# Altium PCB LED_bars.PcbDoc
Units mm, origin at the board's own origin, x right, y up, seen from the top; angles counter-clockwise.
Board outline 39.75 x 57.75 mm, 2 copper layers (Top Layer, Bottom Layer); 32 components, 51 nets, 146 pads, 18 vias.
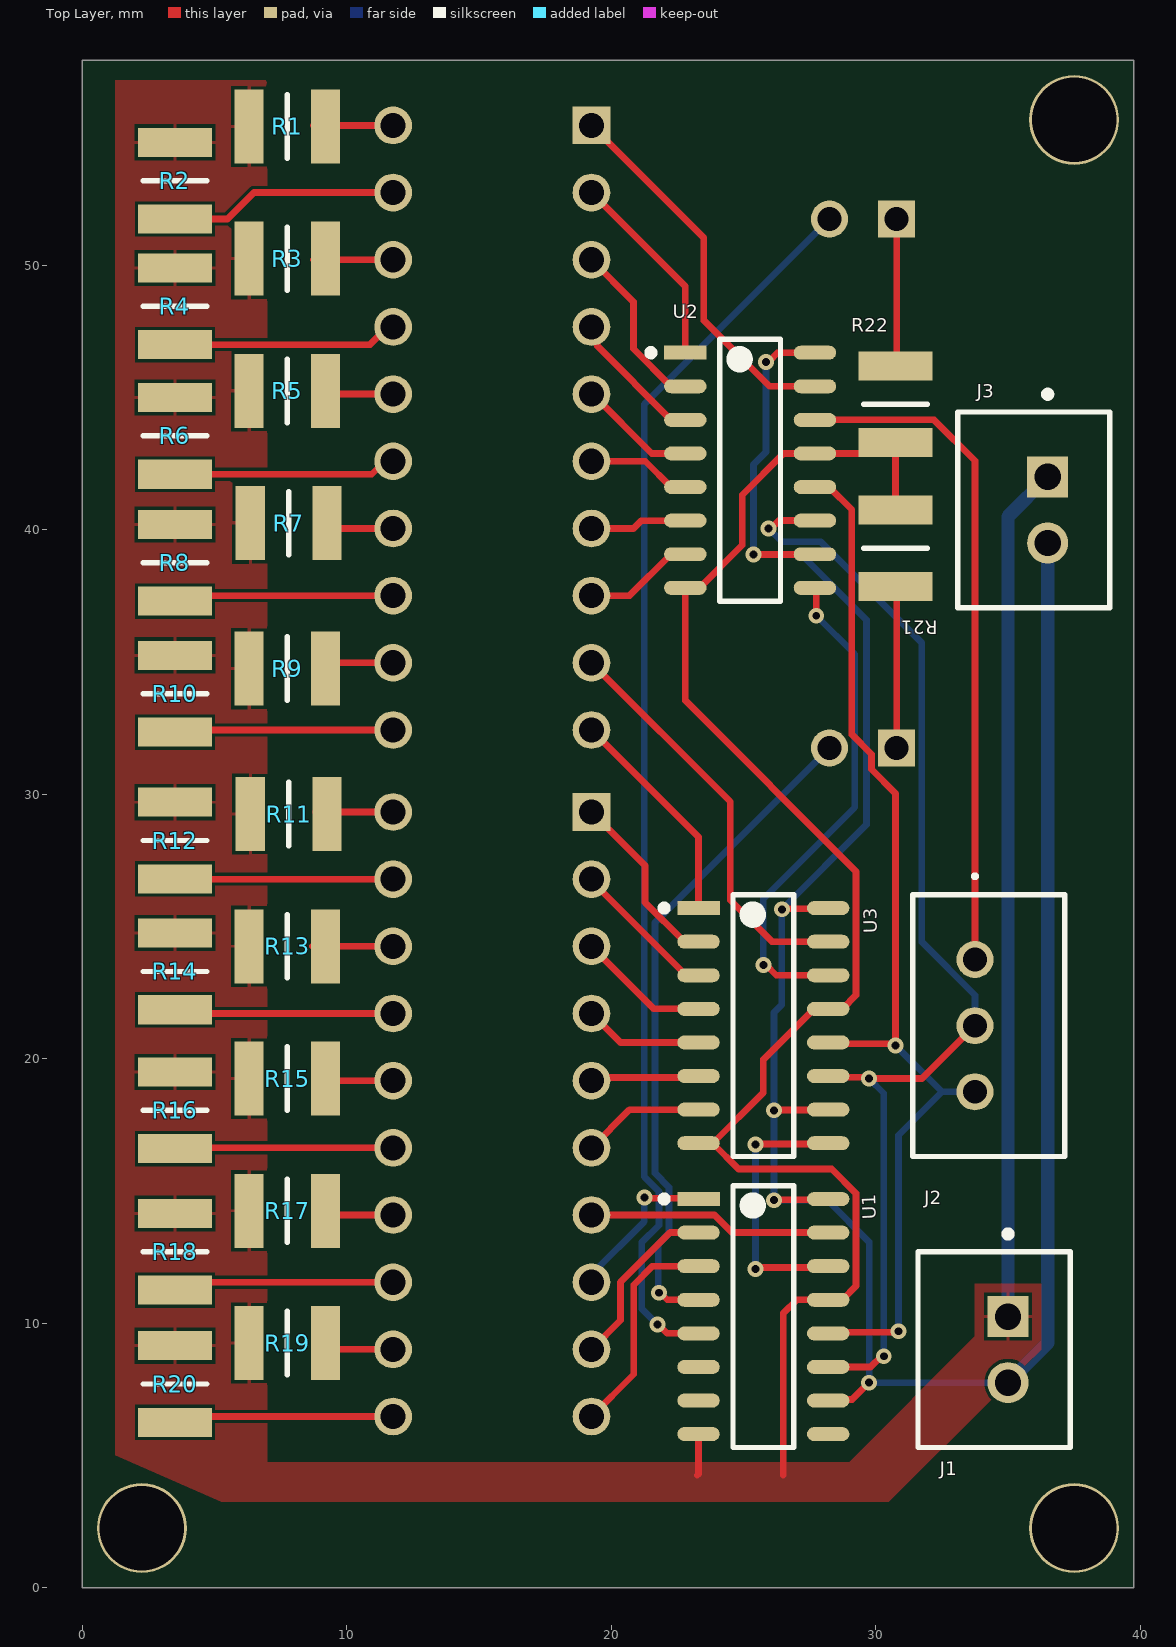
[diagram p0: Top Layer view]
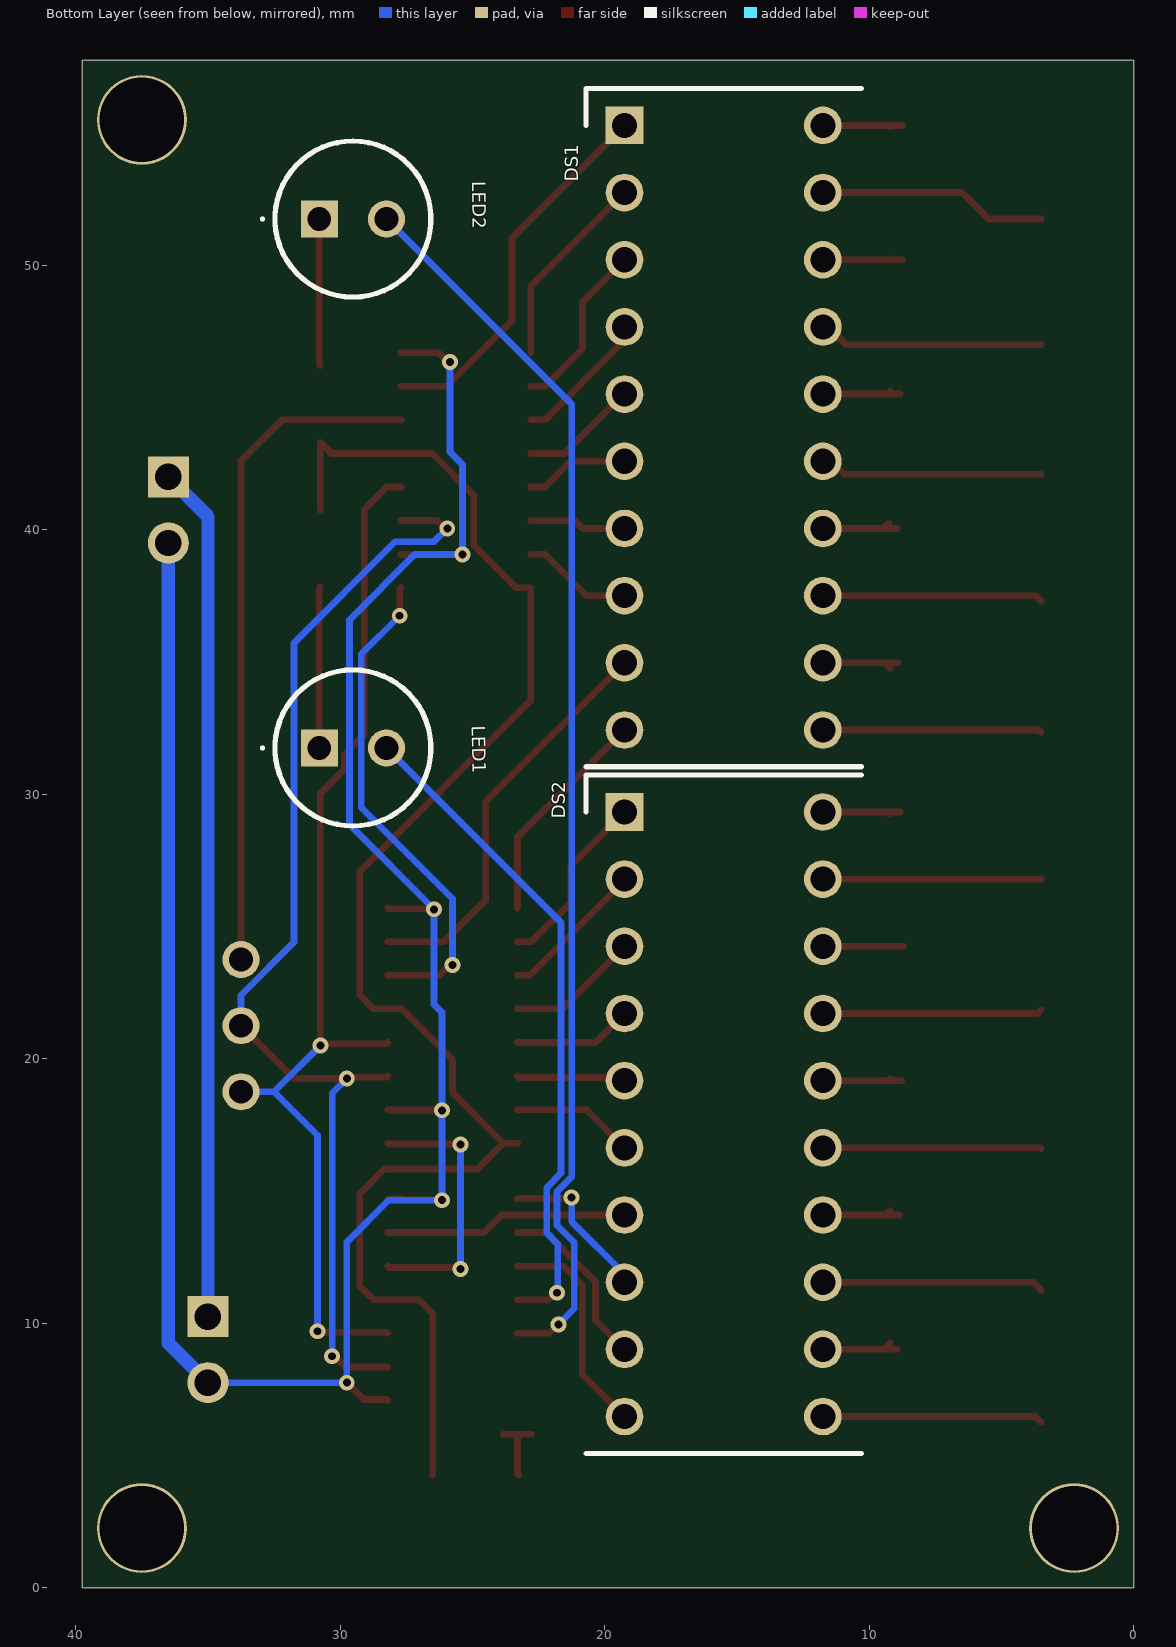
[diagram p1: Bottom Layer view, seen from below]
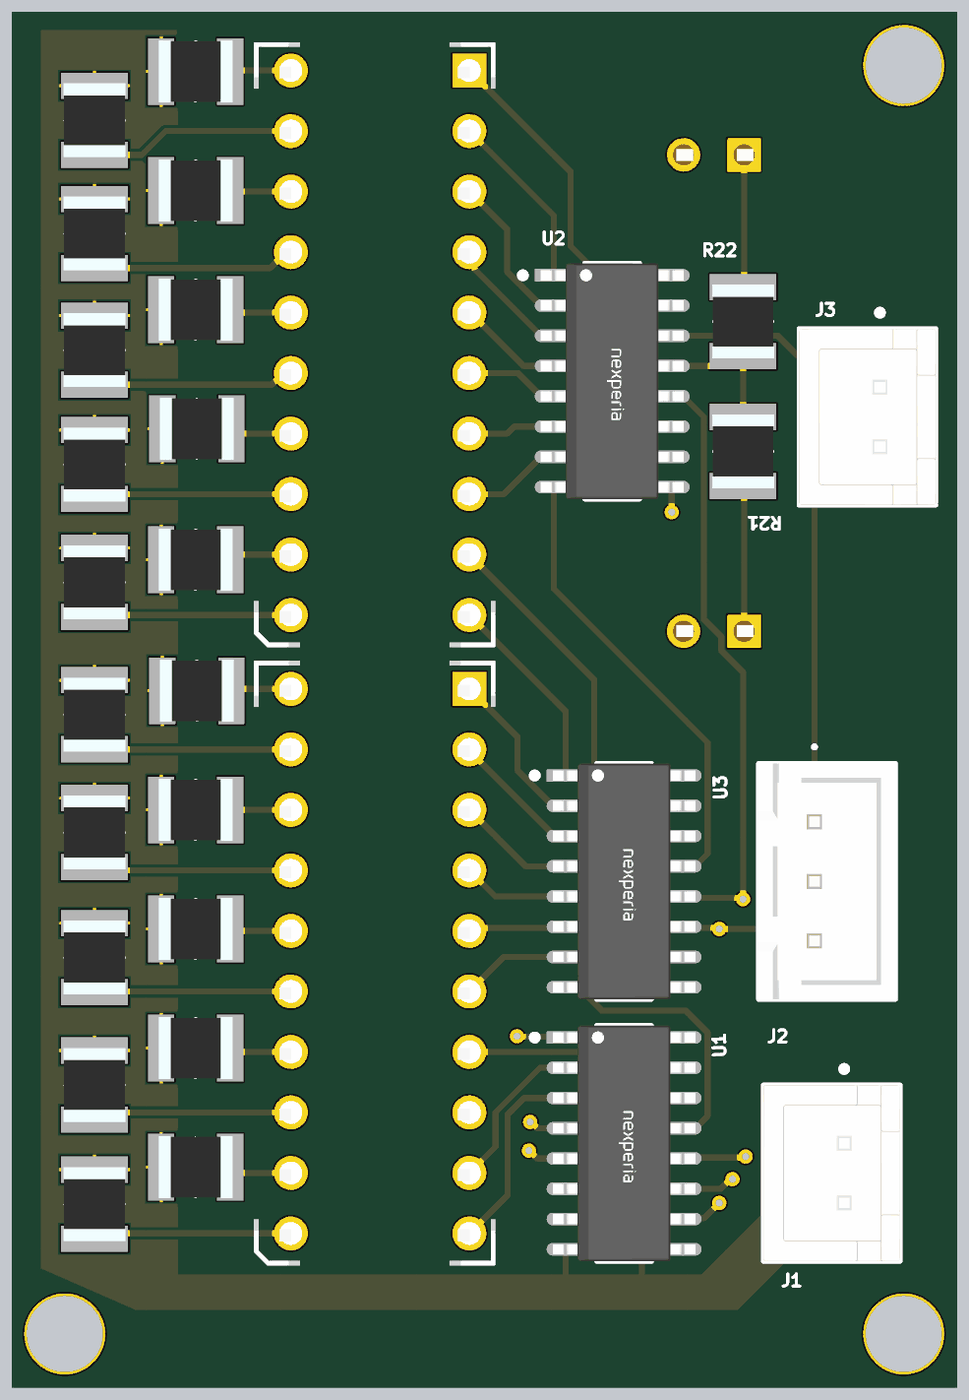
[diagram p2: 3D render of the assembled board from above, using the file's embedded part models]
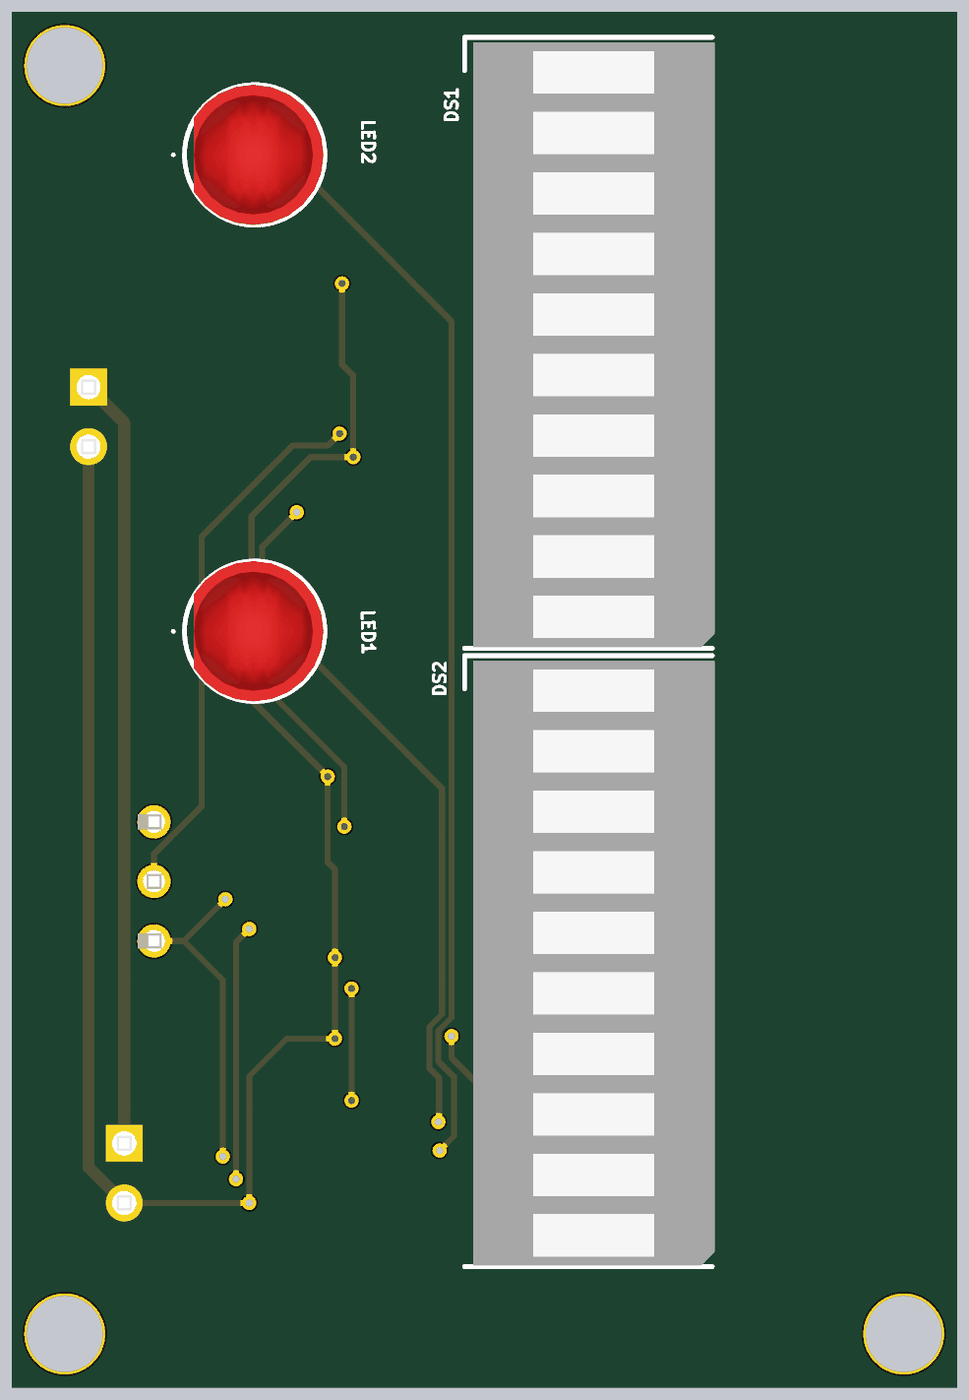
[diagram p3: 3D render of the assembled board from below, using the file's embedded part models]

## Layer stack, top to bottom
Top Solder: solder mask 0.0102, Solder Resist, Dk 3.5
Top Layer: signal copper 0.0356
Dielectric 1: dielectric 0.32, FR-4, Dk 4.8
Bottom Layer: signal copper 0.0356
Bottom Solder: solder mask 0.0102, Solder Resist, Dk 3.5

## Board outline
0,0 0,57.75 39.75,57.75 39.75,0

## Design rules (kind name [scope] priority, off if disabled: settings)
BoardOutlineClearance [All] p1: gap=0.2 ignorepadtopadclearanceinfootprint=FALSE
Clearance [All] p1: gap=0.127 ignorepadtopadclearanceinfootprint=FALSE except(0.25: Arc-Hole Track-Hole SMDPad-Hole THPad-Hole Via-Hole Fill-Hole Poly-Hole Region-Hole Text-Hole)
ComponentClearance [All] p1: gap=0.127 collisioncheckmode=3 verticalgap=0.127 showdistances=TRUE
DiffPairsRouting [All] p1: maxlimit=0.254 minlimit=0.127 mostfreqgap=0.127 toplayer_minwidth=0.127 toplayer_maxwidth=25.4 toplayer_prefwidth=0.127 bottomlayer_minwidth=0.127 bottomlayer_maxwidth=25.4 bottomlayer_prefwidth=0.127 maxuncoupledlength=12.7
Height [All] p1: minheight=0 maxheight=1816.048 prefheight=12.7
HoleSize [All] p1: absolutevalues=TRUE maxlimit=6.3 minlimit=0.3 maxpercent=80.000 minpercent=20.000
HoleToHoleClearance [All] p1: gap=0.25 allowstackedmicrovias=FALSE
MinimumAnnularRing [All] p1: minimumring=0.076
MinimumSolderMaskSliver [All] p1: minsoldermaskwidth=0
PlaneClearance [All] p1: clearance=0.127
PlaneConnect PlaneConnectPowerPads [InPadClass('PowerPads')] p1: planeconnectstyle=Direct reliefexpansion=0.508 reliefentries=4 reliefconductorwidth=0.254 reliefairgap=0.254
PlaneConnect [All] p2: pad.planeconnectstyle=Relief pad.reliefexpansion=0.3 pad.reliefentries=4 pad.reliefconductorwidth=0.127 pad.reliefairgap=0.127 via.planeconnectstyle=Direct via.reliefexpansion=0.3 via.reliefentries=4 via.reliefconductorwidth=0.127 via.reliefairgap=0.127
PolygonConnect PolygonConnectPowerPads [All vs (InPadClass('PowerPads'))] p1: connectstyle=Direct reliefconductorwidth=0.254 reliefentries=4 polygonreliefangle="90 Angle" airgapwidth=0.254
PolygonConnect [All] p2: thpad.connectstyle=Relief thpad.reliefconductorwidth=0.127 thpad.reliefentries=4 thpad.polygonreliefangle="90 Angle" thpad.airgapwidth=0.127 smdpad.connectstyle=Relief smdpad.reliefconductorwidth=0.127 smdpad.reliefentries=4 smdpad.polygonreliefangle="90 Angle" smdpad.airgapwidth=0.127 via.connectstyle=Direct via.reliefconductorwidth=0.127 via.reliefentries=4 via.polygonreliefangle="90 Angle" via.airgapwidth=0.127
RoutingVias [All] p1: holewidth=0.3 width=0.6 viastyle="Through Hole" minholewidth=0.3 minwidth=0.6 maxholewidth=0.6 maxwidth=6.6
SilkToSilkClearance [All] p1: silktosilkclearance=0
SilkToSolderMaskClearance [IsPad] p1: minsilkscreentomaskgap=0.127 clearancetoexposedcopper=TRUE
SolderMaskExpansion [All] p1: expansion=0.075 istentingtop=FALSE
Width [All] p1: maxlimit=25.4 minlimit=0.127 preferedwidth=0.127 minimp=50.000000 maximp=50.000000 favimp=50.000000
20 further rules are at their usual default settings.

## Components (designator, comment, footprint, x,y, rotation, side; value= is the part's Value field where it differs from the comment)
DS1 "DC10GWA" DIPS750W75P254L2540H825Q20N 19.25,55.29 r180 bottom
DS2 "DC10GWA" DIPS750W75P254L2540H825Q20N 19.25,29.33 r180 bottom
J1 "B2B-XH-A(LF)(SN)" FP-B2B-XH-A_LF_SN-MFG 34.475,9 r270 top
J2 "B3B-XH-A_LF__SN_" B3BXHALFSN 33.75,23.75 r270 top
J3 "B2B-XH-A(LF)(SN)" FP-B2B-XH-A_LF_SN-MFG 35.975,40.75 r270 top
LED1 "WP7113ID5V" WP7113ID5V 30.79,31.75 r90 bottom
LED2 "WP7113ID5V" WP7113ID5V 30.79,51.75 r90 bottom
R1 "330" RESC3126X65N 7.75,55.25 r180 top
R2 "RC1210FR-07330RL" RESC3126X65N 3.5,53.2 r90 top
R3 "330" RESC3126X65N 7.75,50.25 r180 top
R4 "RC1210FR-07330RL" RESC3126X65N 3.5,48.45 r90 top
R5 "330" RESC3126X65N 7.75,45.25 r180 top
R6 "RC1210FR-07330RL" RESC3126X65N 3.5,43.55 r90 top
R7 "330" RESC3126X65N 7.8,40.25 r180 top
R8 "RC1210FR-07330RL" RESC3126X65N 3.5,38.75 r90 top
R9 "330" RESC3126X65N 7.75,34.75 r180 top
R10 "330" RESC3126X65N 3.5,33.8 r90 top
R11 "330" RESC3126X65N 7.8,29.25 r180 top
R12 "330" RESC3126X65N 3.5,28.25 r90 top
R13 "330" RESC3126X65N 7.75,24.25 r180 top
R14 "330" RESC3126X65N 3.5,23.3 r90 top
R15 "330" RESC3126X65N 7.75,19.25 r180 top
R16 "330" RESC3126X65N 3.5,18.05 r90 top
R17 "330" RESC3126X65N 7.75,14.25 r180 top
R18 "330" RESC3126X65N 3.5,12.7 r90 top
R19 "RC1210FR-07330RL" RESC3126X65N 7.75,9.25 r180 top
R20 "330" RESC3126X65N 3.5,7.7 r90 top
R21 "330" RESC3126X65N 30.75,39.3 r90 top
R22 "330" RESC3126X65N 30.75,44.75 r270 top
U1 "74HC595D,118" FP-SOT109-1-IPC_C 25.75,10.25 r0 top
U2 "74HC595D,118" FP-SOT109-1-IPC_C 25.25,42.25 r0 top
U3 "74HC595D,118" FP-SOT109-1-IPC_C 25.75,21.25 r0 top

## Footprints (in the part's own frame and the unit in brackets; to place one, negate y for a bottom-side part, rotate by r counter-clockwise, add the part's x,y. Pads: shape width x height; smd on the part's side, far side on the other; paste and mask are expansions set on the pad)
B3BXHALFSN [mm]
  round 1.4 hole 0.9: 1(0,0) 2(2.5,0) 3(5,0)
  silkscreen extent -3.2,-2.35 7.45,3.4, body extent -2.45,-2.35 7.45,3.4, height 7.09
DIPS750W75P254L2540H825Q20N [mm]
  rect 1.425x1.425 hole 0.95: 1(0,0)
  round 1.425 hole 0.95: 2(0,-2.54) 3(0,-5.08) 4(0,-7.62) 5(0,-10.16) 6(0,-12.7) 7(0,-15.24) 8(0,-17.78) 9(0,-20.32) 10(0,-22.86) 11(7.5,-22.86) 12(7.5,-20.32) 13(7.5,-17.78) 14(7.5,-15.24) 15(7.5,-12.7) 16(7.5,-10.16) 17(7.5,-7.62) 18(7.5,-5.08) 19(7.5,-2.54) 20(7.5,0)
  silkscreen extent -1.46,-24.25 8.95,1.39, body extent -1.1,-24.21 9.06,1.19, height 6.29
FP-B2B-XH-A_LF_SN-MFG [mm]
  rect 1.55x1.55 hole 1 paste-2539.97 mask+0: 1(-1.25,0.525)
  round 1.55 hole 1 paste-2539.97 mask+0: 2(1.25,0.525)
  silkscreen extent -4.5,-2.88 3.7,2.88, body extent -3.8,-2.98 3.8,2.98, height 0.25
FP-SOT109-1-IPC_C [mm]
  rect 1.604x0.528 smd paste+0 mask+0: 1(-2.451,4.445)
  rrect100% 1.604x0.528 smd paste+0 mask+0: 2(-2.451,3.175) 3(-2.451,1.905) 4(-2.451,0.635) 5(-2.451,-0.635) 6(-2.451,-1.905) 7(-2.451,-3.175) 8(-2.451,-4.445) 9(2.451,-4.445) 10(2.451,-3.175) 11(2.451,-1.905) 12(2.451,-0.635) 13(2.451,0.635) 14(2.451,1.905) 15(2.451,3.175) 16(2.451,4.445)
  silkscreen extent -3.88,-4.95 1.15,4.95, body extent -3.35,-5.05 3.35,5.05, height 0.25
RESC3126X65N [mm]
  rect 1.1x2.8 smd: 1(-1.45,0) 2(1.45,0)
  silkscreen extent 0,-1.2 0,1.2, body extent -1.55,-1.3 1.55,1.3, height 0.65
WP7113ID5V [mm]
  rect 1.4x1.4 hole 0.9: 1(0,0)
  round 1.4 hole 0.9: 2(0,-2.54)
  silkscreen extent -2.95,-4.22 2.95,2.2, body extent -2.95,-4.15 2.95,1.28, height 15.17

## Part data
DS1 DS2: "Display", Manufacturer_Name=Kingbright, Mouser Part Number=604-DC10GWA, Datasheet Link=http://www.us.kingbright.com/images/catalog/SPEC/DC10GWA.pdf, Height=8.25mm, Manufacturer_Part_Number=DC10GWA, Mouser Price/Stock=https://www.mouser.co.uk/ProductDetail/Kingbright/DC10GWA?qs=E09Sz5t5voWFSEBebdyzXA%3D%3D
J1 J3: library part CMP-2000-05888-3, "CONN HEADER VERT 2POS 2.5MM", Color=Natural, Contact Resistance=20mR, Current Rating=3A, Housing Color=White, Insulation Resistance=1GR, Max Operating Temperature=85°C, Max Voltage Rating (AC)=250V, Min Operating Temperature=-25°C, Connector Type="Male Pin", Contact Material=Brass, Contact Plating=Tin, Contact Type="Male Pin", Depth=5.75mm, Fastening Type=Detent, Housing Material=Polyamide, Lead Free="Lead Free", Lead Pitch=2.5mm, Length=7.4mm, Max Current Rating=3A, Max Voltage Rating (DC)=250V, Mount="Through Hole", Number of Contacts=2, Number of Positions=2, Number of Rows=1, Orientation=Straight, Packaging=Bulk, Pitch=2.5mm, REACH SVHC="No SVHC", Series=XH, Termination=Solder, Voltage Rating=250V, Voltage Rating (AC)=250V, Wire/Cable Gauge=22AWG
J2: "Connector", Arrow Part Number=B3B-XH-A(LF)(SN), Manufacturer_Name="JST (JAPAN SOLDERLESS TERMINALS)", Mouser Part Number=306-B3BXHALFSNP, Arrow Price/Stock=https://www.arrow.com/en/products/b3b-xh-a-lf-sn/jst-manufacturing?utm_currency=USD&region=europe, Datasheet Link=https://datasheet.lcsc.com/szlcsc/1812131720_JST-Sales-America-B3B-XH-A-LF-SN_C144394.pdf, Height=7mm, Manufacturer_Part_Number=B3B-XH-A(LF)(SN), Mouser Price/Stock=https://www.mouser.co.uk/ProductDetail/JST-Commercial/B3B-XH-ALFSN?qs=cdbOS8ANM9BVkoboCCIEMQ%3D%3D
LED1 LED2: "LED", Manufacturer_Name=Kingbright, Mouser Part Number=604-WP7113ID5V, Arrow Part Number=WP7113ID5V, Arrow Price/Stock=https://www.arrow.com/en/products/wp7113id5v/kingbright?utm_currency=USD&region=nac, Datasheet Link=https://www.kingbrightusa.com/images/catalog/SPEC/WP7113ID5V.pdf, Height=9.85mm, Manufacturer_Part_Number=WP7113ID5V, Mouser Price/Stock=https://www.mouser.co.uk/ProductDetail/Kingbright/WP7113ID5V?qs=58z0TXQGVSQgkIxR0kd%2F5Q%3D%3D
R1 R3 R5 R7 R9 R10 R11 R12 R13 R14 R15 R16 R17 R18 R20 R21 R22: library part RC1210FR-07330RL, "Resistor", Manufacturer_Name="Yageo Group", Datasheet Link=https://www.yageogroup.com/content/datasheet/asset/file/PYU-RC_GROUP_51_ROHS_L, Height=0.65mm, Manufacturer_Part_Number=RC1210FR-07330RL
R2 R4 R6 R8 R19: "Resistor", Manufacturer_Name="Yageo Group", Datasheet Link=https://www.yageogroup.com/content/datasheet/asset/file/PYU-RC_GROUP_51_ROHS_L, Height=0.65mm, Manufacturer_Part_Number=RC1210FR-07330RL
U1 U2 U3: library part CMP-14351-000006-1, "IC SHIFT REGISTER 8BIT 16SOIC", RoHS Compliant=Yes

## Free pads (board coordinates)
  round 3.4 hole 3.2: 6(37.5,2.25) 7(2.25,2.25) 8(37.5,55.5)

## Via types
v1: diameter 0.6, hole 0.3, Top Layer to Bottom Layer, 18 vias

## Nets (pads, with @x,y where several pads share a name; then routed paths per layer and width w, separated by ;. In a path a pad name is that pad's centre, name@x,y a point inside that pad or via, vN(x,y) a via of type N, cw(c..) or ccw(c..) an arc to the next point about the centre after c; other vN are vias at no path point)
+5: J1.2 J3.2 U1.10 U1.16 U2.10 U2.16 U3.10 U3.16 | length 95.1
  Top Layer w0.254: v1(25.376,39.063) 25.382,39.069 27.695,39.069 U2.10 ; v1(25.85,46.35) 25.944,46.35 26.289,46.695 U2.16 ; v1(26.15,14.65) 26.172,14.672 27.566,14.672 27.589,14.695 U1.16 ; v1(26.15,18.05) 26.163,18.063 28.188,18.063 U3.10 ; v1(26.45,25.65) 26.473,25.673 28.178,25.673 U3.16 ; U1.10 28.238,7.112 29.106,7.112 29.744,7.75 v1(29.75,7.75)
  Bottom Layer w0.254: v1(25.376,39.063) 25.376,42.469 25.85,42.943 v1(25.85,46.35) ; v1@25.376,39.15 25.463,39.063 27.184,39.063 29.65,36.596 29.65,28.85 v1(26.45,25.65) 26.45,22.05 26.15,21.75 v1(26.15,18.05) v1(26.15,14.65) 28.169,14.65 29.75,13.069 v1(29.75,7.75) J1.2
  Bottom Layer w0.508: J1.2@35.263,8.013 36.5,9.25 J3.2
GND: J1.1 J3.1 R1.2 R2.2 R3.2 R4.2 R5.2 R6.2 R7.2 R8.2 R9.2 R10.2 R11.2 R12.2 R13.2 R14.2 R15.2 R16.2 R17.2 R18.2 R19.2 R20.2 R21.2 R22.2 U1.8 U1.13 U2.8 U2.13 U3.8 U3.13 | length 95.4
  Top Layer w0.254: U1.8@22.761,5.805 U1.8 ; 23.25,4.25 23.299,4.299 U1.8 ; U1.8@23.25,5.756 U1.8 ; U3.8 U3.8@23.837,16.805 ; U1.8@23.837,5.805 U1.8 ; 26.5,4.25 26.5,10.367 27.018,10.885 U1.13 28.739,10.885 29.257,11.403 29.257,14.91 28.336,15.831 24.811,15.831 U3.8@23.837,16.805 ; R21.2 R22.2 30.335,42.885 U2.13 26.518,42.885 24.954,41.321 24.954,39.421 23.337,37.805 U2.8 22.799,33.538 29.257,27.08 29.257,22.403 28.739,21.885 U3.13 27.663,21.885 25.75,19.972 25.75,18.718 U3.8@23.837,16.805
  Bottom Layer w0.508: J1.1 35,40.5 J3.1 ; J1.1@35.025,10 J1.1@35.275,10.25
MCU_Clock: J2.2 U1.11 U2.11 U3.11 | length 44.2
  Top Layer w0.254: v1(25.95,40.05) 26.044,40.05 26.341,40.348 27.698,40.348 U2.11 ; U3.11 28.248,19.298 29.702,19.298 v1(29.75,19.25) 31.75,19.25 J2.2 ; U1.11 29.805,8.345 30.21,8.75 v1(30.304,8.75)
  Bottom Layer w0.254: v1(25.95,40.05) 26.45,39.55 27.917,39.55 31.744,35.723 31.744,24.407 33.75,22.401 J2.2 ; v1(29.75,19.25) 30.304,18.696 v1(30.304,8.75)
MCU_Data: J2.1 U2.14 | length 25.5
  Top Layer w0.254: U2.14 32.204,44.155 33.75,42.609 J2.1
MCU_Latch: J2.3 U1.12 U2.12 U3.12 | length 41.4
  Top Layer w0.254: U2.12 28.239,41.615 29.096,40.758 29.096,32.253 29.836,31.513 29.836,30.945 30.75,30.031 v1(30.75,20.5) 30.687,20.563 28.253,20.563 U3.12 ; U1.12 28.241,9.655 30.817,9.655 v1(30.858,9.696)
  Bottom Layer w0.254: v1(30.75,20.5) 32.5,18.75 ; v1(30.858,9.696) 30.858,17.108 32.5,18.75 ; J2.3 32.5,18.75
NetDS1_11: DS1.11 R10.1 | length 8.3
  Top Layer w0.254: R10.1 3.58,32.43 DS1.11
NetDS1_12: DS1.12 R9.1 | length 3.1
  Top Layer w0.254: R9.1@8.92,34.97 DS1.12 ; R9.1 R9.1@9.42,34.97
NetDS1_13: DS1.13 R8.1 | length 8.3
  Top Layer w0.254: R8.1 3.71,37.51 DS1.13
NetDS1_14: DS1.14 R7.1 | length 3.1
  Top Layer w0.254: R7.1@8.95,40.05 DS1.14 ; R7.1 R7.1@9.45,40.05
NetDS1_15: DS1.15 R6.1 | length 8.5
  Top Layer w0.254: R6.1 10.943,42.1 11.433,42.59 DS1.15
NetDS1_16: DS1.16 R5.1 | length 3.1
  Top Layer w0.254: R5.1@8.82,45.13 DS1.16 ; R5.1 R5.1@9.32,45.13
NetDS1_17: DS1.17 R4.1 | length 8.5
  Top Layer w0.254: R4.1 10.874,47 11.544,47.67 DS1.17
NetDS1_18: DS1.18 R3.1 | length 3.1
  Top Layer w0.254: R3.1@8.74,50.21 DS1.18 ; R3.1 R3.1@9.24,50.21
NetDS1_19: DS1.19 R2.1 | length 8.7
  Top Layer w0.254: R2.1 5.491,51.75 6.491,52.75 DS1.19
NetDS1_20: DS1.20 R1.1 | length 3.1
  Top Layer w0.254: R1.1@8.74,55.29 DS1.20 ; R1.1 R1.1@9.24,55.29
NetDS2_11: DS2.11 R20.1 | length 8.3
  Top Layer w0.254: R20.1 3.72,6.47 DS2.11
NetDS2_12: DS2.12 R19.1 | length 3.1
  Top Layer w0.254: R19.1@8.94,9.01 DS2.12 ; R19.1 R19.1@9.44,9.01
NetDS2_13: DS2.13 R18.1 | length 8.4
  Top Layer w0.254: R18.1 3.8,11.55 DS2.13
NetDS2_14: DS2.14 R17.1 | length 3.1
  Top Layer w0.254: R17.1@8.86,14.09 DS2.14 ; R17.1 R17.1@9.36,14.09
NetDS2_15: DS2.15 R16.1 | length 8.3
  Top Layer w0.254: R16.1 3.53,16.63 DS2.15
NetDS2_16: DS2.16 R15.1 | length 3.1
  Top Layer w0.254: R15.1@8.78,19.17 DS2.16 ; R15.1 R15.1@9.28,19.17
NetDS2_17: DS2.17 R14.1 | length 8.3
  Top Layer w0.254: R14.1 3.64,21.71 DS2.17
NetDS2_18: DS2.18 R13.1 | length 3
  Top Layer w0.254: R13.1@8.7,24.25 DS2.18
NetDS2_19: DS2.19 R12.1 | length 8.3
  Top Layer w0.254: R12.1 3.51,26.79 DS2.19
NetDS2_20: DS2.20 R11.1 | length 3
  Top Layer w0.254: R11.1@8.83,29.33 DS2.20 ; R11.1 R11.1@9.33,29.33
NetLED1_1: LED1.1 R21.1 | length 6.1
  Top Layer w0.254: R21.1 30.79,37.81 LED1.1
NetLED2_1: LED2.1 R22.1 | length 5.6
  Top Layer w0.254: R22.1 30.79,46.24 LED2.1
NetU1_14: U1.14 U3.9 | length 10.3
  Top Layer w0.254: v1(25.45,12.05) 25.503,12.103 28.148,12.103 U1.14 ; v1(25.45,16.75) 25.478,16.778 28.173,16.778 U3.9
  Bottom Layer w0.254: v1(25.45,12.05) v1(25.45,16.75)
NetU2_9: U2.9 U3.14 | length 18.9
  Top Layer w0.254: v1(25.75,23.55) 25.844,23.55 26.239,23.155 U3.14 ; U2.9 27.75,37.756 v1(27.75,36.75)
  Bottom Layer w0.254: v1(25.75,23.55) 25.75,26.05 29.204,29.504 29.204,35.296 v1(27.75,36.75)
sr1_1: DS1.1 U2.15 | length 14.4
  Top Layer w0.254: DS1.1 23.5,51.04 23.5,47.917 25.992,45.425 U2.15
sr1_2: DS1.2 U2.1 | length 7.5
  Top Layer w0.254: DS1.2 22.799,49.201 U2.1
sr1_3: DS1.3 U2.2 | length 6.6
  Top Layer w0.254: DS1.3 20.841,48.619 20.841,46.845 22.261,45.425 U2.2
sr1_4: DS1.4 U2.3 | length 5.3
  Top Layer w0.254: DS1.4 19.474,47.446 19.474,46.942 22.261,44.155 U2.3
sr1_5: DS1.5 U2.4 | length 4.5
  Top Layer w0.254: DS1.5 19.285,45.13 21.53,42.885 U2.4
sr1_6: DS1.6 U2.5 | length 4
  Top Layer w0.254: DS1.6 21.286,42.59 22.261,41.615 U2.5
sr1_7: DS1.7 U2.6 | length 3.7
  Top Layer w0.254: DS1.7 20.841,40.05 21.136,40.345 U2.6
sr1_8: DS1.8 U2.7 | length 4.2
  Top Layer w0.254: DS1.8 20.696,37.51 22.261,39.075 U2.7
sr2_1: DS1.9 U3.15 | length 15.5
  Top Layer w0.254: DS1.9 24.5,29.72 24.5,26 26.075,24.425 U3.15
sr2_2: DS1.10 U3.1 | length 8.4
  Top Layer w0.254: DS1.10 23.299,28.381 U3.1
sr2_3: DS2.1 U3.2 | length 6.9
  Top Layer w0.254: DS2.1 21.272,27.308 21.272,25.914 22.761,24.425 U3.2
sr2_4: DS2.2 U3.3 | length 5.6
  Top Layer w0.254: DS2.2 19.25,26.728 22.823,23.155 U3.3
sr2_5: DS2.3 U3.4 | length 5
  Top Layer w0.254: DS2.3 21.615,21.885 U3.4
sr2_6: DS2.4 U3.5 | length 4.5
  Top Layer w0.254: DS2.4 20.345,20.615 U3.5
sr2_7: DS2.5 U3.6 | length 4.1
  Top Layer w0.254: DS2.5 19.373,19.293 23.247,19.293 U3.6
sr2_8: DS2.6 U3.7 | length 4.6
  Top Layer w0.254: DS2.6 20.695,18.075 U3.7
sr3_1: DS2.7 U1.15 | length 9.2
  Top Layer w0.254: DS2.7 23.905,14.09 24.57,13.425 U1.15
sr3_2: DS2.8 U1.1 | length 6.1
  Top Layer w0.254: v1(21.25,14.75) 21.278,14.722 23.272,14.722 U1.1
  Bottom Layer w0.254: DS2.8 19.25,11.85 21.25,13.85 v1(21.25,14.75)
sr3_3: DS2.9 U1.2 | length 6.7
  Top Layer w0.254: DS2.9 20.35,10.11 20.35,11.55 22.225,13.425 U1.2
sr3_4: DS2.10 U1.3 | length 8.4
  Top Layer w0.254: DS2.10 20.85,8.07 20.85,11.45 21.555,12.155 U1.3
sr3_5: LED1.2 U1.4 | length 25.3
  Top Layer w0.254: v1(21.804,11.15) 21.851,11.15 22.116,10.885 U1.4
  Bottom Layer w0.254: v1(21.804,11.15) 21.777,11.177 21.777,12.999 22.185,13.407 22.185,15.137 21.65,15.672 21.65,25.15 LED1.2
sr3_6: LED2.2 U1.5 | length 47.1
  Top Layer w0.254: v1(21.75,9.95) 21.781,9.95 22.116,9.615 U1.5
  Bottom Layer w0.254: v1(21.75,9.95) 21.15,10.55 21.15,13.05 21.804,13.704 21.804,14.979 21.25,15.533 21.25,44.75 LED2.2
pads on no net: U1.6 U1.7 U1.9

## Polygon pours and split planes (outlines as drawn)
GND on Top Layer "GND_L01_P001" (solid, pour order 1): 33.75,11.5 33.75,9.5 29,4.75 7,4.75 7,57 1.25,57 1.25,5 5.25,3.25 30.5,3.25 36.25,9 36.25,11.5

## Silkscreen, mask and mechanical layers (free items; w line width, h text height)
Mechanical 1:
  the board outline again, w0.254